# Altium PCB 2Layer_Layout.PcbDoc
Units mil, origin at the board's own origin, x right, y up, seen from the top; angles counter-clockwise.
Board outline 1500 x 1300 mil, 2 copper layers (Top Layer, Bottom Layer), stack 61.756 mil thick; 9 components, 20 nets, 67 pads, 10 vias.
Unrouted connection lines stored in the file: 3.
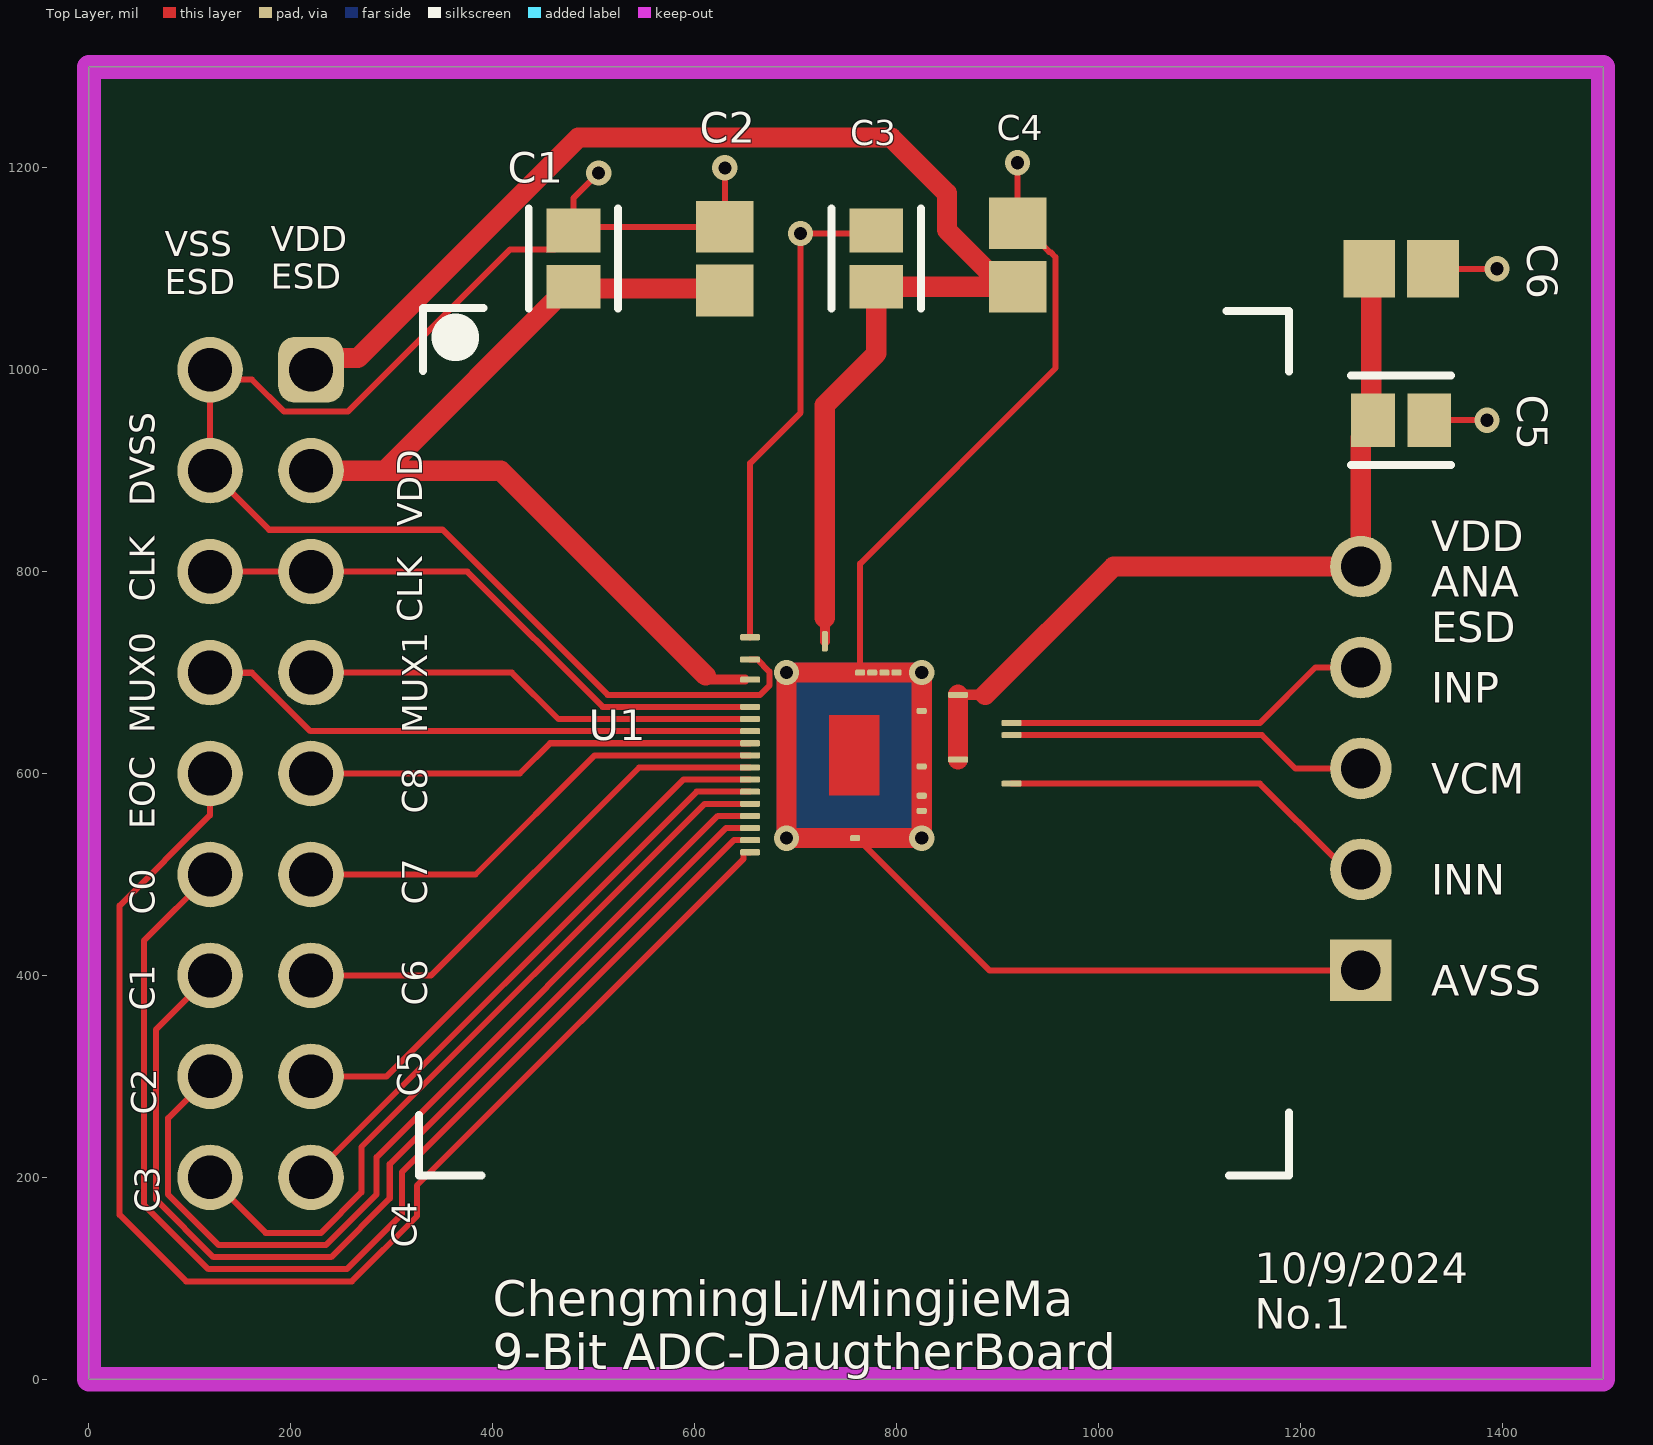
[diagram p0: Top Layer view]
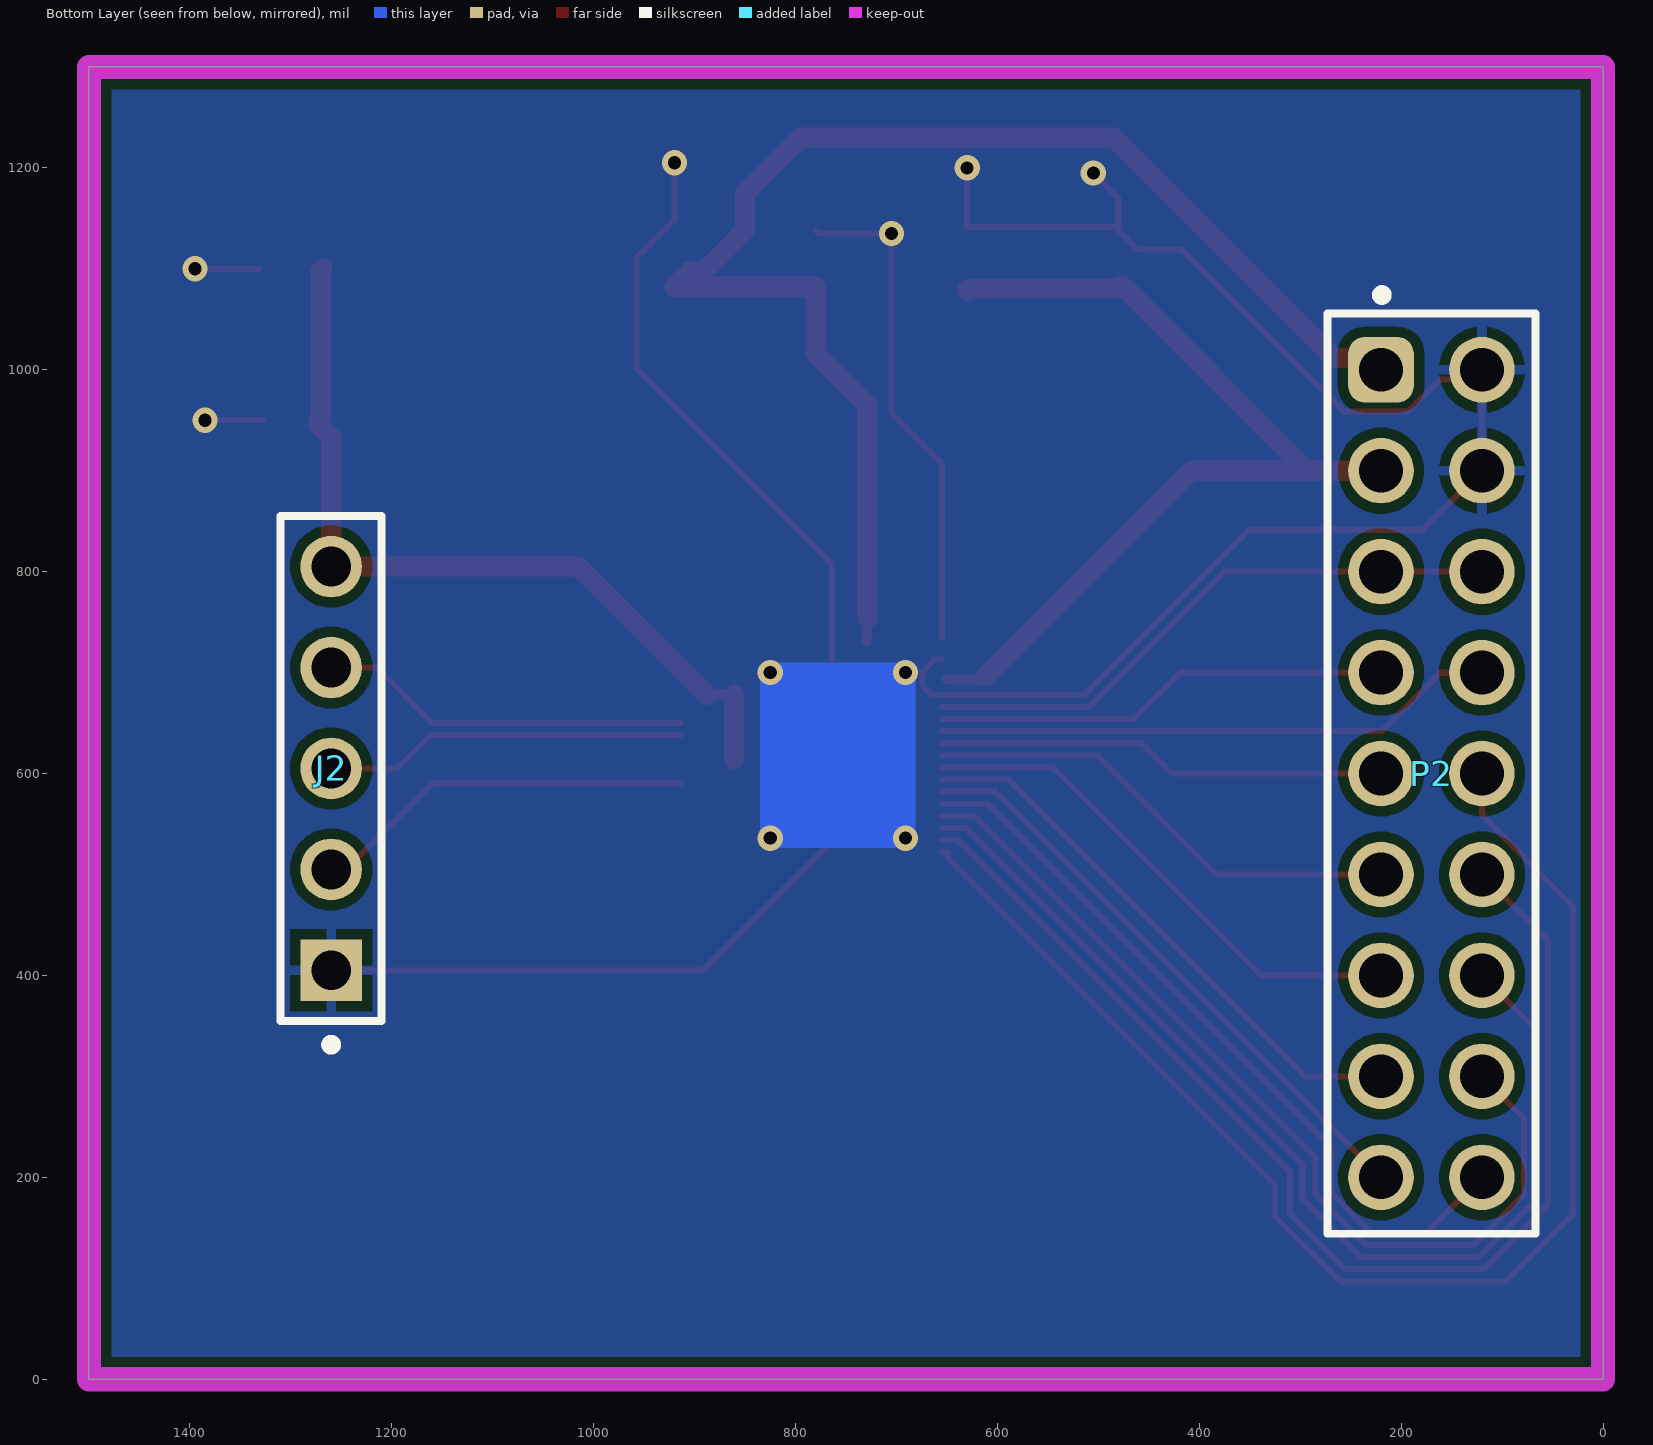
[diagram p1: Bottom Layer view, seen from below]

## Layer stack, top to bottom
Top Solder: solder mask 1, SM-001, Dk 4
Top Layer: signal copper 1.378
Dielectric 1: core 59, Core-043, Dk 4.3
Bottom Layer: signal copper 1.378
Bottom Solder: solder mask 1, SM-001, Dk 4

## Board outline
0,0 1500,0 1500,1300 0,1300

## Design rules (kind name [scope] priority, off if disabled: settings)
BoardOutlineClearance [All] p1: gap=12 ignorepadtopadclearanceinfootprint=FALSE except(0: Arc-SplitContinuation Track-SplitContinuation SMDPad-SplitContinuation THPad-SplitContinuation Via-SplitContinuation Fill-SplitContinuation Poly-SplitContinuation Region-SplitContinuation Text-SplitContinuation)
Clearance [All] p1: gap=6 ignorepadtopadclearanceinfootprint=TRUE except(10: Arc-Fill Arc-Poly Arc-Region Track-Fill Track-Poly Track-Region SMDPad-Fill SMDPad-Poly SMDPad-Region THPad-Fill THPad-Poly THPad-Region Via-Fill Via-Poly Via-Region Fill-Fill Fill-Poly Fill-Region Poly-Poly Poly-Region Region-Region)
NetAntennae [All] p1 off: netantennaetolerance=0
PlaneClearance [All] p1: clearance=10
PlaneConnect [All] p1: planeconnectstyle=Direct reliefexpansion=20 reliefentries=4 reliefconductorwidth=10 reliefairgap=10
PolygonConnect [All] p1: thpad.connectstyle=Relief thpad.reliefconductorwidth=10 thpad.reliefentries=4 thpad.polygonreliefangle="90 Angle" thpad.airgapwidth=10 smdpad.connectstyle=Direct smdpad.reliefconductorwidth=10 smdpad.reliefentries=4 smdpad.polygonreliefangle="90 Angle" smdpad.airgapwidth=10 via.connectstyle=Direct via.reliefconductorwidth=10 via.reliefentries=4 via.polygonreliefangle="90 Angle" via.airgapwidth=10
RoutingVias [All] p1: holewidth=13 width=25 viastyle="Through Hole" minholewidth=13 minwidth=25 maxholewidth=60 maxwidth=80
SolderMaskExpansion [All] p1: expansion=4 istentingtop=FALSE
UnRoutedNet [All] p1: checkbadconnections=TRUE
Width "Schematic Width Constraint_2" [InNet('VDD_ESD_T12')] p1: maxlimit=100 minlimit=10 preferedwidth=20 minimp=50.000000 maximp=50.000000 favimp=50.000000
Width "Schematic Width Constraint_1" [InNet('VDD_ANA_ESD')] p2: maxlimit=100 minlimit=10 preferedwidth=20 minimp=50.000000 maximp=50.000000 favimp=50.000000
Width "Schematic Width Constraint" [InNet('VDD_T12')] p3: maxlimit=100 minlimit=10 preferedwidth=20 minimp=50.000000 maximp=50.000000 favimp=50.000000
Width [All] p4: maxlimit=100 minlimit=6 preferedwidth=6 minimp=50.000000 maximp=50.000000 favimp=50.000000
26 further rules are at their usual default settings.

## Components (designator, comment, footprint, x,y, rotation, side; value= is the part's Value field where it differs from the comment)
C1 "08055C104KAT4A" FP-0805-L_2_01_0_2-W_1_25-IPC_C 480,1110 r90 top
C2 "08055D105KAT2A" CAPC2013X140X50NL20T25 630,1110 r270 top value=1uF
C3 "08055C104KAT4A" FP-0805-L_2_01_0_2-W_1_25-IPC_C 780,1110 r90 top
C4 "08055D105KAT2A" CAPC2013X140X50NL20T25 920,1113.68 r270 top value=1uF
C5 "08055C104KAT4A" FP-0805-L_2_01_0_2-W_1_25-IPC_C 1300,950 r0 top
C6 "08055D105KAT2A" CAPC2013X140X50NL20T25 1300,1100 r180 top value=1uF
J2 "90120-0125" FP-90120-0125-MFG 1260,605 r90 bottom
P2 "61301821121" 61301821121 170,600 r270 bottom
U1 "U_ADC_Mega2" ADC_Team12 344,219 r0 top

## Footprints (in the part's own frame and the unit in brackets; to place one, negate y for a bottom-side part, rotate by r counter-clockwise, add the part's x,y. Pads: shape width x height; smd on the part's side, far side on the other; paste and mask are expansions set on the pad)
61301821121 [mm] "Pin Header, pitch 2.54 mm, THT, Vertical, dual row, 18p"
  rrect50% 1.65x1.65 hole 1.1: 1(-10.16,-1.27)
  round 1.65 hole 1.1: 2(-10.16,1.27) 3(-7.62,-1.27) 4(-7.62,1.27) 5(-5.08,-1.27) 6(-5.08,1.27) 7(-2.54,-1.27) 8(-2.54,1.27) 9(0,-1.27) 10(0,1.27) 11(2.54,-1.27) 12(2.54,1.27) 13(5.08,-1.27) 14(5.08,1.27) 15(7.62,-1.27) 16(7.62,1.27) 17(10.16,-1.27) 18(10.16,1.27)
  silkscreen extent -12.16,-2.62 11.58,2.62, body extent -11.43,-2.54 11.43,2.54, height 8.59
ADC_Team12 [mil]
  rrect50% 6x20 smd: 1(385,512)
  rrect50% 20x6 smd: 2(311,516) 3(311,494) 4(311,474) 5(311,447) 6(311,435) 6(311,435) 7(311,423) 8(311,411) 9(311,399) 10(311,387) 11(311,375) 12(311,363) 13(311,351) 14(311,339) 15(311,327) 16(311,315) 17(311,303) 32(570,371) 36(517,395) 38(570,419) 39(570,431) 44(517,459)
  rrect50% 10x6 smd: 22(415,317) 27(481,344) 29(481,359) 34(481,388) 43(481,443) 45(456,481) 46(444,481) 47(432,481) 52(420,481)
  Top Layer region: 389,359 439,359 439,439 389,439
  Top Layer lines w20: 347,317 347,481 481,481 481,317 347,317
  Bottom Layer region: 356,326 472,326 472,472 356,472
  Bottom Layer lines w20: 347,317 347,481 481,481 481,317 347,317
  silkscreen extent -17,-17 845,842
CAPC2013X140X50NL20T25 [mm] "Chip Capacitor, 2-Leads, Body 2.00x1.25mm, IPC Medium Density"
  rect 1.3x1.45 smd: 1(-0.8,0) 2(0.8,0)
  body extent -1.1,-0.72 1.1,0.72, height 1.4
FP-0805-L_2_01_0_2-W_1_25-IPC_C [mil]
  rect 43.49x53.39 smd paste+0 mask+0: 1(-27.79,0) 2(27.79,0)
  silkscreen extent -50,-44 50,44, body extent -53,-32 53,32, height 10
FP-90120-0125-MFG [mm]
  rect 1.55x1.55 hole 1 paste-1000 mask+0: 1(-5.08,0)
  round 1.55 hole 1 paste-1000 mask+0: 2(-2.54,0) 3(0,0) 4(2.54,0) 5(5.08,0)
  silkscreen extent -7.07,-1.27 6.35,1.27, body extent -6.35,-1.25 6.35,1.25, height 9.65

## Part data
C1 C3 C5: library part CMP-1036-04419-3, "CAP CER 0.1UF 50V X7R 0805", Capacitance=100nF, Case Code (Imperial)=0805, Case Code (Metric)=2012, Dielectric=X7R, Dielectric Material=Ceramic, Max Operating Temperature=125°C, Min Operating Temperature=-55°C, Package Quantity=15000, Tolerance=10%, Voltage=50V, Case/Package=0805, Construction=Flat, Depth=1.25mm, Dissipation Factor=2.5%, Height=0.94mm, Lead Free="Lead Free", Length=2.01mm, Mount="Surface Mount", Number of Pins=2, Packaging="Tape and Reel", Radiation Hardening=No, REACH SVHC="No SVHC", RoHS Compliant=Yes, Termination=SMD/SMT, Voltage Rating=50V, Voltage Rating (DC)=50V, Width=1.25mm
C2 C4 C6: library part CMP-1036-04762-2, Manufacturer="AVX Interconnect / Elco", Part Number=08055D105KAT2A
J2: library part CMP-00257-00655425-1, "90120-0125 2.54mm Pitch C-Grid III Header, Single Row, Vertical, 5 Circuits, Tin (Sn) Plating", Contact Resistance=20mΩ, Current Rating=3A, Housing Color=Black, Manufacturer Lifecycle Status=ACTIVE, Max Operating Temperature=125°C, Max Voltage Rating (DC)=350.35kV, Min Operating Temperature=-55°C, Voltage Rating=350V, Contact Gender=Male, Contact Material=Brass, Contact Plating=Tin, Country of Origin=SK, Gender=Male, Glow Wire Compliant=Non-compliant, Housing Material=Polyester, Lead Free="Lead Free", Lead Length=2.9mm, Lead Pitch=2.54mm, Lifecycle Status=Production, Mating Post Length=6.75mm, Mount="Through Hole", NexarPartId=655425, Number of Circuits=5, Number of Contacts=5, Number of Pins=5, Number of Positions=5, Number of Rows=1, Orientation=Vertical, Packaging=Bulk, Pitch=2.54mm, Plating=Tin, Radiation Hardening=No, REACH SVHC="No SVHC", RoHS=Compliant, Schedule B=8536694040, Termination=Solder, Voltage Rating (AC)=350V
P2: library part CMP-1502-01101-3, Color=Black, Contact Resistance=20mΩ, Current Rating=3A, Operating Supply Voltage=250V, Connector Type="Male Pin", Contact Material=Copper, Contact Mating Length=5.9944mm, Contact Plating=Gold, Gender=Male, Lead Pitch=2.54mm, Mount="Through Hole", NexarPartId=32855553, Number of Contacts=18, Number of Pins=18, Number of Positions=18, Number of Rows=2, Orientation=Vertical, Packaging=Bulk, Pitch=2.54mm, REACH SVHC=Unknown, RoHS=Compliant, Row Spacing=2.54mm, Termination=Solder
U1: "MegaGroup2"

## Via types
v1: diameter 25, hole 13, Top Layer to Bottom Layer, 10 vias

## Nets (pads, with @x,y where several pads share a name; then routed paths per layer and width w, separated by ;. In a path a pad name is that pad's centre, name@x,y a point inside that pad or via, vN(x,y) a via of type N, cw(c..) or ccw(c..) an arc to the next point about the centre after c; other vN are vias at no path point)
AVSS: C1.2 C2.1 C3.2 C4.1 C5.2 C6.1 J2.1 P2.2 P2.4 U1.2 U1.3 U1.22 U1.27 U1.29 U1.34 U1.43 U1.45 U1.46 U1.47 U1.52 | length 3290.7
  Top Layer w6: v1(505,1195) 480,1170 C1.2 ; v1(630,1200) C2.1 483.71,1141.5 C1.2 ; U1.3 662,713 674,701 674,687.15 664.85,678 513.95,678 350.47,841.48 178.52,841.48 P2.4 P2.2 129.66,990.34 161.48,990.34 193.31,958.52 256.53,958.52 417.06,1119.04 461.26,1119.04 C1.2 ; U1.2 655,907.43 705,957.43 v1(705,1135) 777.21,1135 C3.2 ; U1.22 761,536 892,405 J2.1 ; U1.52 764,807.98 957.54,1001.52 957.54,1111.5 952.27,1116.78 951.35,1116.78 920,1148.13 v1(920,1205) ; C5.2 v1(1385,950) ; C6.1 v1(1395,1100)
  other v1: 691,536 825,536 691,700 825,700
CLK_T12: P2.5 P2.6 U1.5 | length 590.5
  Top Layer w6: P2.6 374.98,800 508.98,666 U1.5
Code0: P2.12 U1.16 | length 1181.6
  Top Layer w6: P2.12 54.52,434.52 54.52,172.88 118.4,109 255.54,109 310,163.46 310,205 639,534 U1.16
Code1: P2.14 U1.15 | length 1052.3
  Top Layer w6: P2.14 66.52,346.52 66.52,177.85 123.37,121 233.6,121 239.94,121 298,179.06 298,213 631,546 U1.15
Code2: P2.16 U1.14 | length 929.2
  Top Layer w6: P2.16 78.52,258.52 78.52,182.82 128.34,133 228.63,133 234.97,133 285,183.03 285,220 623,558 U1.14
Code3: P2.18 U1.13 | length 760.2
  Top Layer w6: P2.18 175,145 230,145 270,185 270,230 610,570 U1.13
Code4: P2.17 U1.12 | length 593.2
  Top Layer w6: P2.17 602,582 U1.12
Code5: P2.15 U1.11 | length 556.8
  Top Layer w6: P2.15 294.98,300 588.98,594 U1.11
Code6: P2.13 U1.10 | length 520.3
  Top Layer w6: P2.13 338.98,400 544.98,606 U1.10
Code7: P2.11 U1.9 | length 483.9
  Top Layer w6: P2.11 382.98,500 500.98,618 U1.9
Code8: P2.9 U1.8 | length 447.4
  Top Layer w6: P2.9 426.98,600 456.98,630 U1.8
EOC: P2.10 U1.17 | length 1323.6
  Top Layer w6: P2.10 119.86,599.86 119.86,558.52 30.52,469.18 30.52,162.94 96.46,97 260.51,97 325,161.49 325,192 648.58,515.58 648.58,522 U1.17
IN_T12_N: J2.2 U1.32 | length 381.2
  Top Layer w6: U1.32 1160,590 1234.47,515.53 1249.47,515.53 J2.2
IN_T12_P: J2.4 U1.39 | length 368.8
  Top Layer w6: U1.39 1160,650 1215,705 J2.4
MUX0: P2.8 U1.7 | length 559
  Top Layer w6: P2.8 120.14,699.86 161.48,699.86 219.34,642 U1.7
MUX1: P2.7 U1.6 | length 454.1
  Top Layer w6: P2.7 418.98,700 464.98,654 U1.6@655,654
VCM_T12: J2.3 U1.38 | length 359.7
  Top Layer w6: U1.38 1162.09,638 1195.09,605 J2.3
VDD_ANA_ESD: C5.1 C6.2 J2.5 U1.36 U1.44 | length 817.2
  Top Layer w10: U1.44 888,678
  Top Layer w20: U1.36 U1.44 ; 888,678 1015,805 J2.5 1260,932.83 1272.21,945.05 C5.1 1270.36,951.85 1270.36,1098.15 C6.2
VDD_ESD_T12: C3.1 C4.2 P2.1 U1.1 | length 1390.2
  Top Layer w10: U1.1 729,754
  Top Layer w20: P2.1 231.59,1011.59 266.28,1011.59 484.69,1230 795,1230 850,1175 850,1138.42 890.64,1097.78 904.41,1097.78 C4.2 C3.1 780,1016 729,965 729,754
VDD_T12: C1.1 C2.2 P2.3 U1.4 | length 929.9
  Top Layer w10: 611,697 615,693 U1.4@650,693
  Top Layer w20: P2.3 292.83,900 ; 611,697 408,900 292.83,900 ; C2.2 628.15,1080.36 481.85,1080.36 C1.1 475.05,1082.21 292.83,900

## Polygon pours and split planes (outlines as drawn)
AVSS on Bottom Layer "AVSS_L02_P000" (solid, pour order 0): 0,0 1495,0 1495,1300 0,1300

## Keep-outs
Keep-Out Layer:
  the board outline again, w24

## Silkscreen, mask and mechanical layers (free items; w line width, h text height)
Top Overlay:
  text "VDD / ESD" at 180,1080 h25
  text "VSS / ESD" at 75,1075 h25
  text "DVSS" at 65,865 h25 r90
  text "VDD" at 330,845 h25 r90
  text "CLK" at 65,770 h25 r90
  text "CLK" at 330,750 h25 r90
  text "VDD / ANA / ESD" at 1330,730 h30
  text "INP" at 1330,670 h30
  text "MUX0" at 65,640 h25 r90
  text "MUX1" at 335,640 h25 r90
  text "VCM" at 1330,580 h30
  text "C8" at 335,560 h25 r90
  text "EOC" at 65,545 h25 r90
  text "INN" at 1330,480 h30
  text "C7" at 335,470 h25 r90
  text "C0" at 65,460 h25 r90
  text "AVSS" at 1330,380 h30
  text "C6" at 335,370 h25 r90
  text "C1" at 65,365 h25 r90
  text "C5" at 330,280 h25 r90
  text "C2" at 66.52,262.18 h25 r90
  text "C3" at 70,165 h25 r90
  text "C4" at 325,130 h25 r90
  text "10/9/2024 / No.1" at 1155,50 h30
  text "ChengmingLi/MingjieMa / 9-Bit ADC-DaugtherBoard" at 400,10 h35